# EAGLE board Robot Dog Boston V1 (EAGLE 6.1)
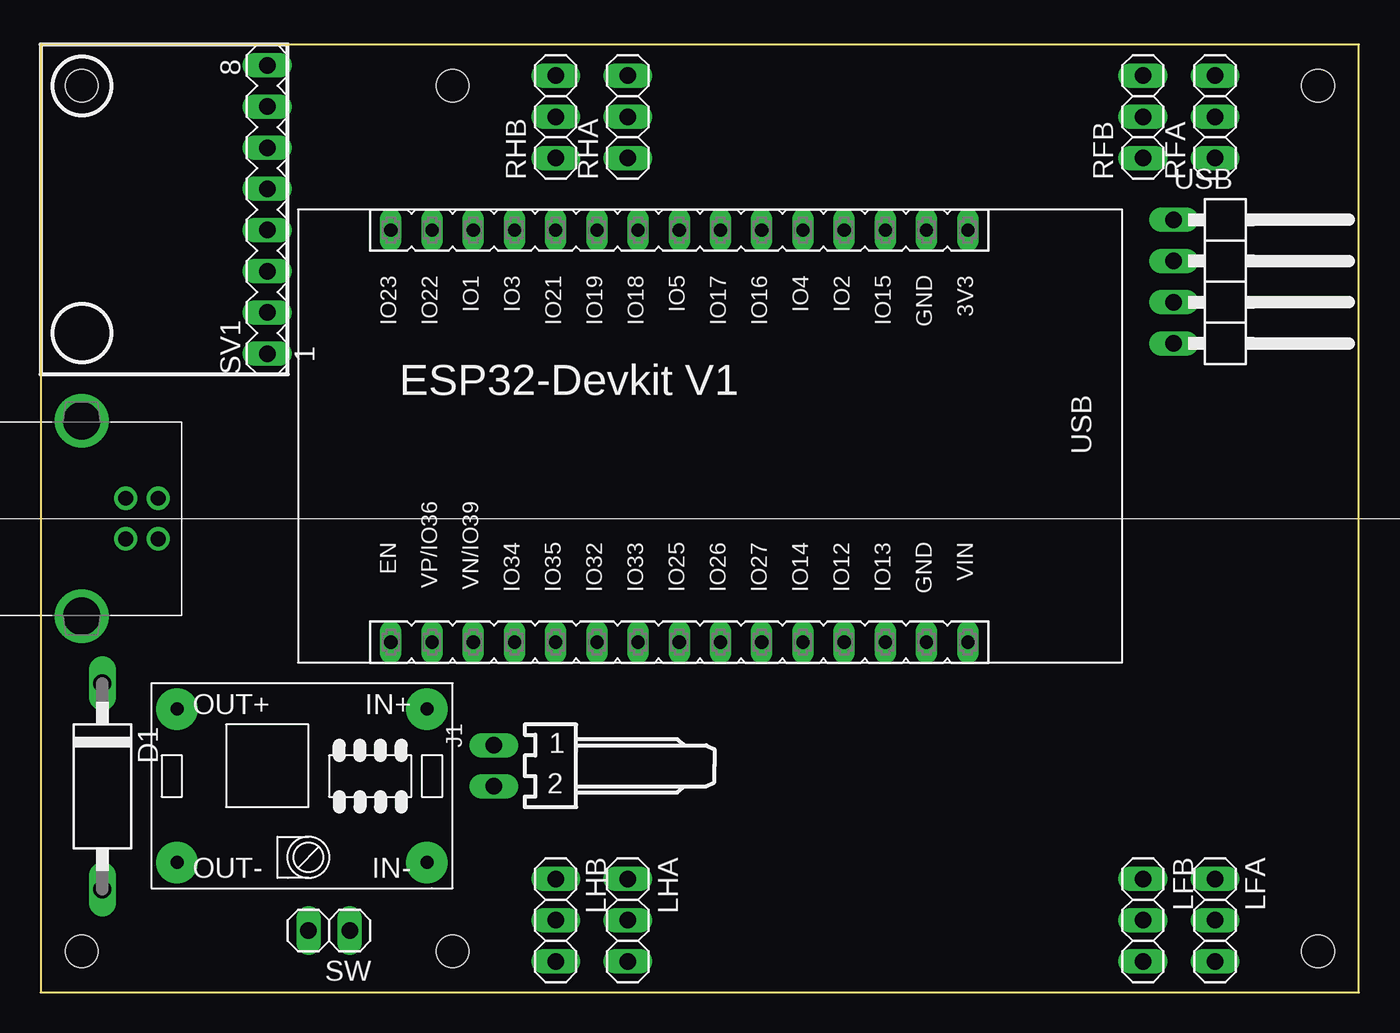
[diagram p0: board, top side]
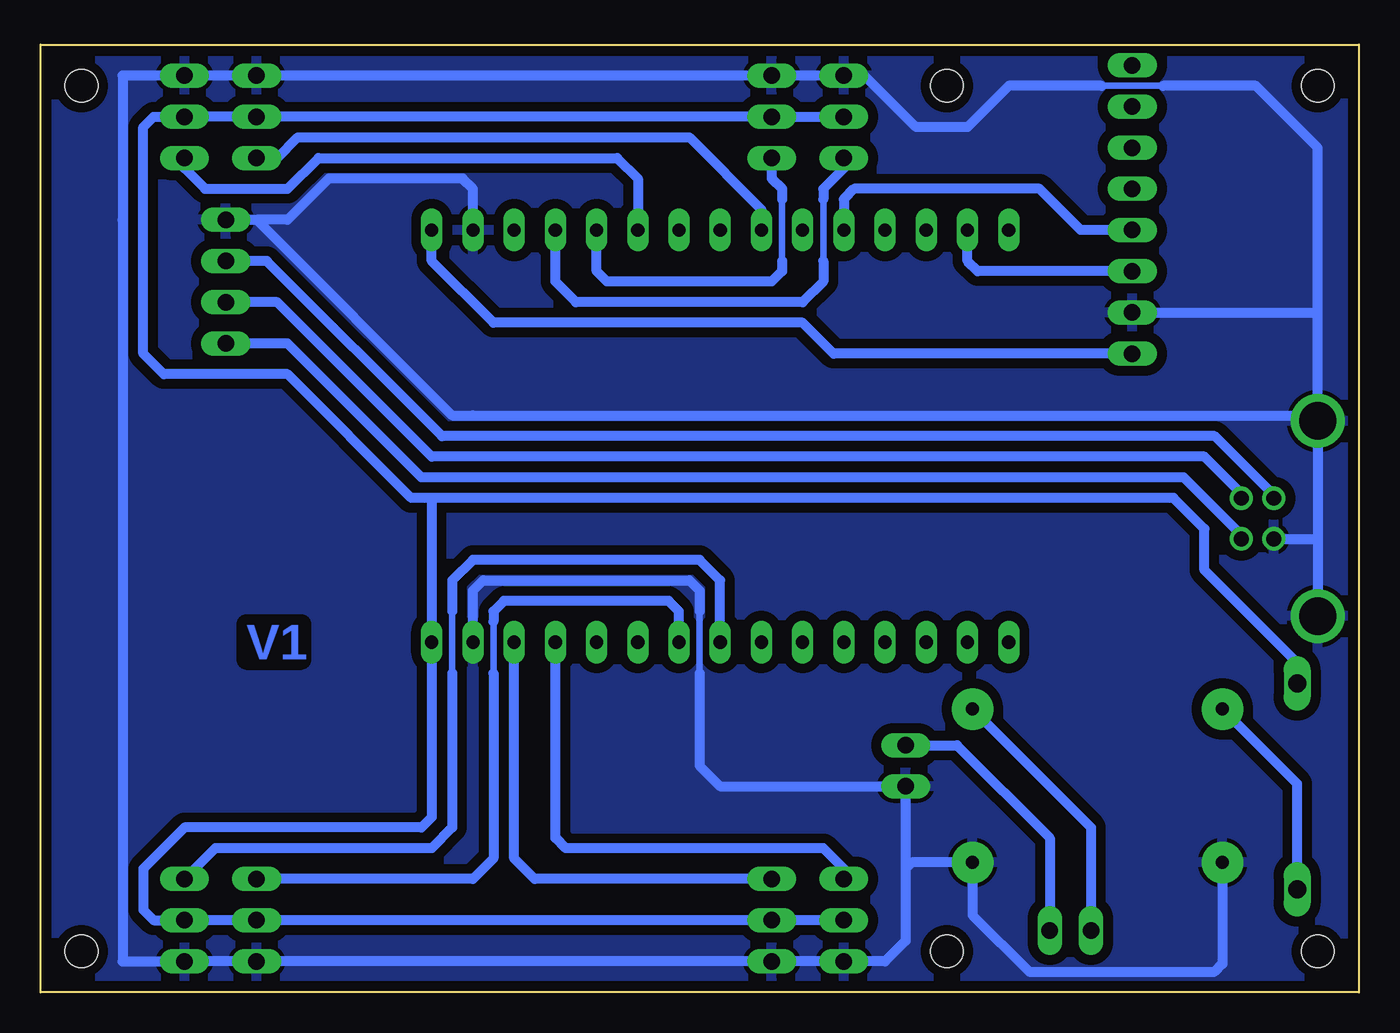
[diagram p1: board, bottom side, seen from below]

Size 81.26 x 58.42 mm. Coordinates in mm from the lower left corner, seen from the top.
Outline: 0,0 81.26,0 81.26,58.42 0,58.42 0,0
Copper layers (1*16): Top 0.035mm / dielectric 1.5mm / Bottom 0.035mm
Design rules: minimum track width 10mil, minimum drill 23mil, track to track 8mil, track to pad 8mil, pad to pad 8mil, via to via 8mil, smd to smd 8mil, copper to edge 10mil, drill to drill 8mil, minimum pad ring 10mil, minimum via ring 8mil, stop-mask expansion 4mil, vias tented up to drill 0mil, thermal gap 10mil
Holes 2 mm at 2.54,55.88 78.74,55.88 2.54,2.54 78.74,2.54 25.4,55.88 25.4,2.54

## Footprints (pad centres in the part's own frame; a part is rotated, then mirrored left to right if it is on the bottom)
DO15-12 = drill 1.118 long: A 6.35,0; C -6.35,0
7395-02 = drill 1.016 long: 1 1.27,0; 2 -1.27,0
1X03 = drill 1.016 long: 1 -2.54,0; 2 0,0; 3 2.54,0
MA08-1 = drill 1.016 long: 1 -8.89,0; 2 -6.35,0; 3 -3.81,0; 4 -1.27,0; 5 1.27,0; 6 3.81,0; 7 6.35,0; 8 8.89,0
1X02 = drill 1.016 long: 1 -1.27,0; 2 1.27,0
ESP32-DEVKIT1S = drill 0.813 long: 3V3 -17.78,-12.7; D1 12.7,-12.7; D2 -10.16,-12.7; D3 10.16,-12.7; D4 -7.62,-12.7; D5 0,-12.7; D12 -10.16,12.7; D13 -12.7,12.7; D14 -7.62,12.7; D15 -12.7,-12.7; D16 -5.08,-12.7; D17 -2.54,-12.7; D18 2.54,-12.7; D19 5.08,-12.7; D21 7.62,-12.7; D22 15.24,-12.7; D23 17.78,-12.7; D25 0,12.7; D26 -2.54,12.7; D27 -5.08,12.7; D32 5.08,12.7; D33 2.54,12.7; D34 10.16,12.7; D35 7.62,12.7; D36 15.24,12.7; D39 12.7,12.7; EN 17.78,12.7; GND@1 -15.24,12.7; GND@2 -15.24,-12.7; VIN -17.78,12.7
5V_REGULATOR_BOARD_MICRO_15_4_X_9_4 = drill 0.8 pad 2.54: IN+ 1.587,1.587; IN- 1.587,11.043; OUT+ 16.992,1.587; OUT- 16.992,11.043
1X04/90 = drill 1.016 long: 1 -3.81,-3.81; 2 -1.27,-3.81; 3 1.27,-3.81; 4 3.81,-3.81
85-32004-00X = drill 0.92 pad 1.27: 1 4.71,-1.25; 2 4.71,1.25; 3 2.71,1.25; 4 2.71,-1.25 | drill 2.3 pad 3: M1 0,6.02; M2 0,-6.02

## Placement (x,y rotation side)
D1  3A  [DO15-12]  3.81,12.7 270 top
J1  7.4V  [7395-02]  27.94,13.97 90 top
LFA  [1X03]  72.39,4.45 270 top
LFB  [1X03]  67.94,4.45 270 top
LHA  [1X03]  36.2,4.45 270 top
LHB  [1X03]  31.75,4.45 270 top
RFA  [1X03]  72.39,53.98 90 top
RFB  [1X03]  67.94,53.98 90 top
RHA  [1X03]  36.2,53.98 90 top
RHB  [1X03]  31.75,53.98 90 top
SV1  MPU6050  [MA08-1]  13.97,48.26 90 top
SW  [1X02]  17.78,3.81 180 top
U$1  ESP32DEVKITV1S  [ESP32-DEVKIT1S]  39.37,34.29 180 top
U$2  REGULATOR_MICRO15.4X9.4  [5V_REGULATOR_BOARD_MICRO_15_4_X_9_4]  25.4,19.05 180 top
USB  [1X04/90]  73.66,43.81 270 top
X1  [85-32004-00X]  2.54,29.21 0 top

## Library data of the parts
D1 = diode
J1 = con-molex; OC_FARNELL: 9731601; OC_NEWARK: unknown
LFA LFB LHA LHB RFA RFB RHA RHB SW USB = pinhead
SV1 = con-lstb; OC_FARNELL: unknown; OC_NEWARK: unknown
U$1 = ESP32-DEVKITV1
U$2 = 8x8x8_cube
X1 = con-cypressindustries; OC_FARNELL: unknown; OC_NEWARK: unknown

## Nets
+3V3: SV1.1 U$1.3V3
+5V: USB.4 X1.1
ADO: SV1.7
BAT+: J1.1 SW.1
D+: USB.2 X1.3
D-: USB.3 X1.2
GND: J1.2 LFA.3 LFB.3 LHA.3 LHB.3 RFA.3 RFB.3 RHA.3 RHB.3 SV1.2 U$1.GND@1 U$1.GND@2 U$2.IN- U$2.OUT- USB.1 X1.4 X1.M1 X1.M2
INT: SV1.8
LFA: LFA.1 U$1.D25
LFB: LFB.1 U$1.D26
LFG: U$1.D27
LHA: LHA.1 U$1.D13
LHB: LHB.1 U$1.D12
LHG: U$1.D14
N$1: D1.A U$2.OUT+
RFA: RFA.1 U$1.D16
RFB: RFB.1 U$1.D18
RFG: U$1.D17
RHA: RHA.1 U$1.D4
RHB: RHB.1 U$1.D2
RHG: U$1.D15
SCL: SV1.3 U$1.D22
SDA: SV1.4 U$1.D21
SW: SW.2 U$2.IN+
VIN: D1.C LFA.2 LFB.2 LHA.2 LHB.2 RFA.2 RFB.2 RHA.2 RHB.2 U$1.VIN
XCL: SV1.6
XDA: SV1.5

## Tracks (layer width: path | path; a pad name or v marks a point on that pad's centre or on a via)
+3V3
  Bottom 0.61: SV1.1 32.38,39.37 34.29,41.27 53.34,41.27 57.15,45.09 U$1.3V3
+5V
  Bottom 0.61: X1.1 7.25,28.2 10.79,31.75 57.78,31.75 66.04,40.01 USB.4
BAT+
  Bottom 0.61: J1.1 24.77,15.24 19.05,9.53 SW.1
D+
  Bottom 0.61: X1.3 5.25,30.65 8.89,34.29 56.52,34.29 67.31,45.09 USB.2
D-
  Bottom 0.61: X1.2 7.25,30.75 9.53,33.02 57.15,33.02 66.67,42.55 USB.3
GND
  Bottom 0.406: 12.06,55.88 15.88,55.88 | 40.64,23.5 40.64,19.68
  Bottom 0.61: 2.54,35.56 X1.M1 2.54,27.94 | 2.54,41.91 2.54,52.07 6.35,55.88 12.06,55.88 | 15.88,55.88 21.59,55.88 24.13,53.34 25.4,53.34 27.3,53.34 30.48,56.52 RHB.3 RHA.3 RFB.3 RFA.3 76.2,56.52 76.2,47.62 76.2,1.91 LFA.3 LFB.3 LHA.3 LHB.3 29.21,1.91 27.94,3.17 27.94,7.62 | 2.54,27.94 X1.M2 | X1.4 2.56,27.96 2.54,27.94 | 27.94,7.62 J1.2 39.37,12.7 40.64,13.97 40.64,19.68 | 27.94,7.62 27.55,8.01 U$2.IN- 23.81,4.76 20.32,1.27 8.89,1.27 8.41,1.75 U$2.OUT- | USB.1 67.94,47.62 | 67.94,47.62 55.88,35.56 54.61,35.56 2.54,35.56 | U$1.GND@1 54.61,24.77 53.98,25.4 41.27,25.4 40.64,24.77 40.64,23.5 | U$1.GND@2 54.61,49.53 55.24,50.16 63.5,50.16 66.04,47.62 67.94,47.62 | SV1.2 2.54,41.91 | 2.54,35.56 2.54,41.91
  pour Bottom (isolate 0.61): -1.27,-1.27 82.55,-1.27 82.55,59.69 -1.27,59.69
LFA
  Bottom 0.406: 55.88,23.5 55.88,19.68
  Bottom 0.61: U$1.D25 39.37,25.4 40.64,26.67 54.61,26.67 55.88,25.4 55.88,23.5 | 55.88,19.68 55.88,10.16 57.15,8.89 70.48,8.89 LFA.1
LFB
  Bottom 0.406: 53.34,22.86 53.34,19.68
  Bottom 0.61: U$1.D26 41.91,23.5 42.55,24.13 52.7,24.13 53.34,23.5 53.34,22.86 | 53.34,19.68 53.34,8.26 54.61,6.99 LFB.1
LHA
  Bottom 0.61: LHA.1 50.8,6.99 52.07,8.26 U$1.D13
LHB
  Bottom 0.61: LHB.1 31.75,7.62 33.02,8.89 48.9,8.89 49.53,9.53 U$1.D12
N$1
  Bottom 0.61: D1.A 3.81,12.87 U$2.OUT+
N$2  (via drill 0.6 pad 1.93)
  other vias: 2.54,55.88
N$3  (via drill 0.6 pad 1.93)
  other vias: 78.74,55.88
N$4  (via drill 0.6 pad 1.93)
  other vias: 2.54,2.54
N$5  (via drill 0.6 pad 1.93)
  other vias: 25.4,2.54
N$6  (via drill 0.6 pad 1.93)
  other vias: 78.74,2.54
N$7  (via drill 0.6 pad 1.93)
  other vias: 25.4,55.88
RFA
  Bottom 0.61: RFA.1 72.39,50.8 71.12,49.53 66.04,49.53 64.14,51.44 45.72,51.44 44.45,50.16 U$1.D16
RFB
  Bottom 0.61: RFB.1 66.67,51.44 65.41,52.7 41.27,52.7 36.83,48.26 U$1.D18
RHA
  Bottom 0.406: 35.56,48.9 35.56,45.09
  Bottom 0.61: RHA.1 36.2,50.16 35.56,49.53 35.56,48.9 | 35.56,45.09 35.56,44.45 36.2,43.81 46.35,43.81 46.99,44.45 U$1.D4
RHB
  Bottom 0.406: 33.02,48.9 33.02,45.09
  Bottom 0.61: RHB.1 31.75,50.8 33.02,49.53 33.02,48.9 | 33.02,45.09 33.02,43.81 34.29,42.55 48.26,42.55 49.53,43.81 U$1.D2
SCL
  Bottom 0.61: SV1.3 23.5,44.45 24.13,45.09 U$1.D22
SDA
  Bottom 0.61: SV1.4 17.14,46.99 19.68,49.53 31.11,49.53 31.75,48.9 U$1.D21
SW
  Bottom 0.61: U$2.IN+ 16.51,10.16 SW.2
VIN
  Bottom 0.61: 57.15,30.48 11.43,30.48 9.53,28.57 9.53,26.04 3.81,20.32 D1.C | 57.15,30.48 U$1.VIN 57.15,10.79 57.78,10.16 72.39,10.16 74.93,7.62 74.93,5.08 74.3,4.45 LFA.2 LFB.2 LHA.2 LHB.2 | RHB.2 RHA.2 RFB.2 RFA.2 74.3,53.98 74.93,53.34 74.93,39.37 73.66,38.1 66.04,38.1 58.42,30.48 57.15,30.48

## Text on the board
Bottom: V1
Document: GND | D+ | D- | +5V